# Altium PCB MCU.PcbDoc
Units mm, origin at the board's own origin, x right, y up, seen from the top; angles counter-clockwise.
Board outline 47.6 x 56 mm, 2 copper layers (Top Layer, Bottom Layer); 51 components, 75 nets, 191 pads, 174 vias.
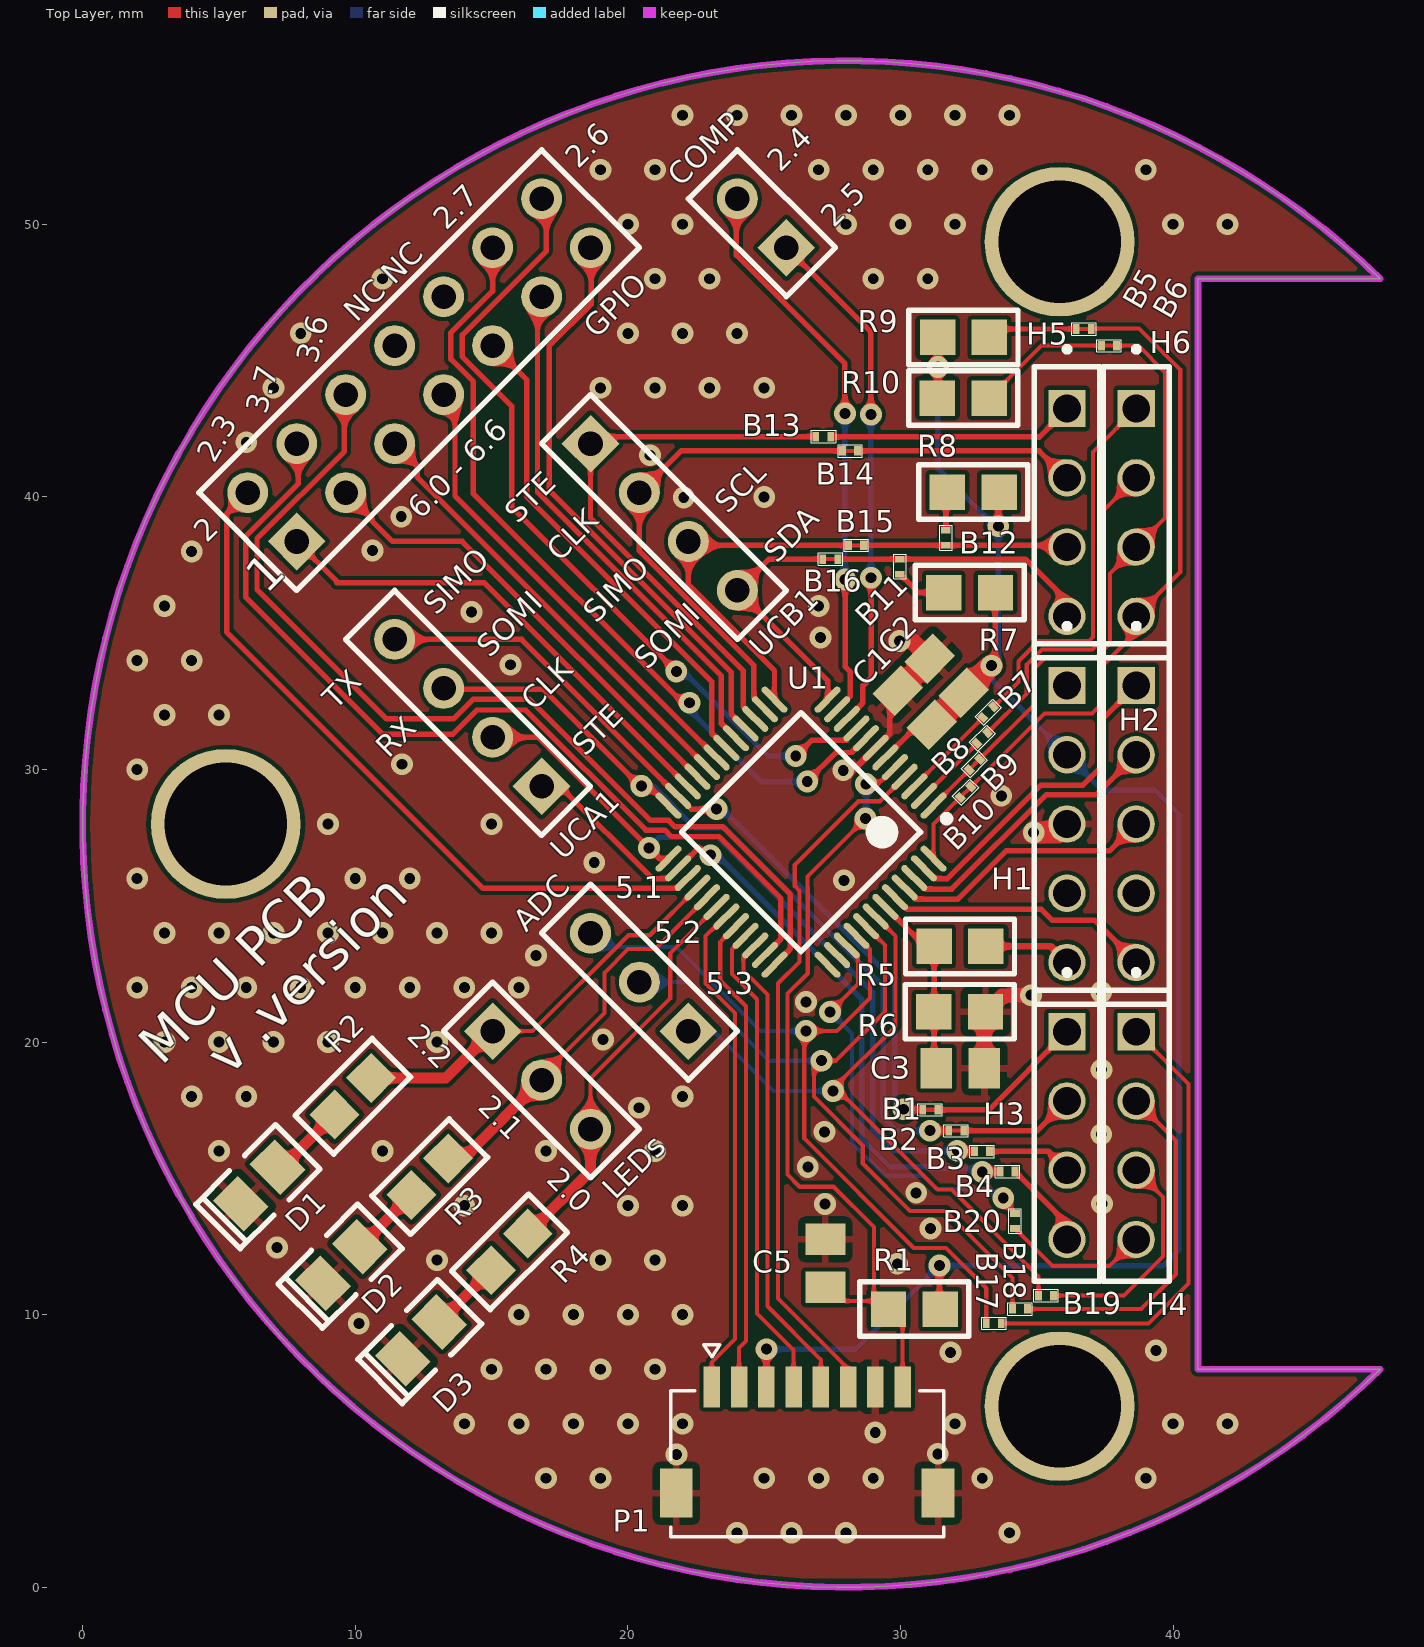
[diagram p0: Top Layer view]
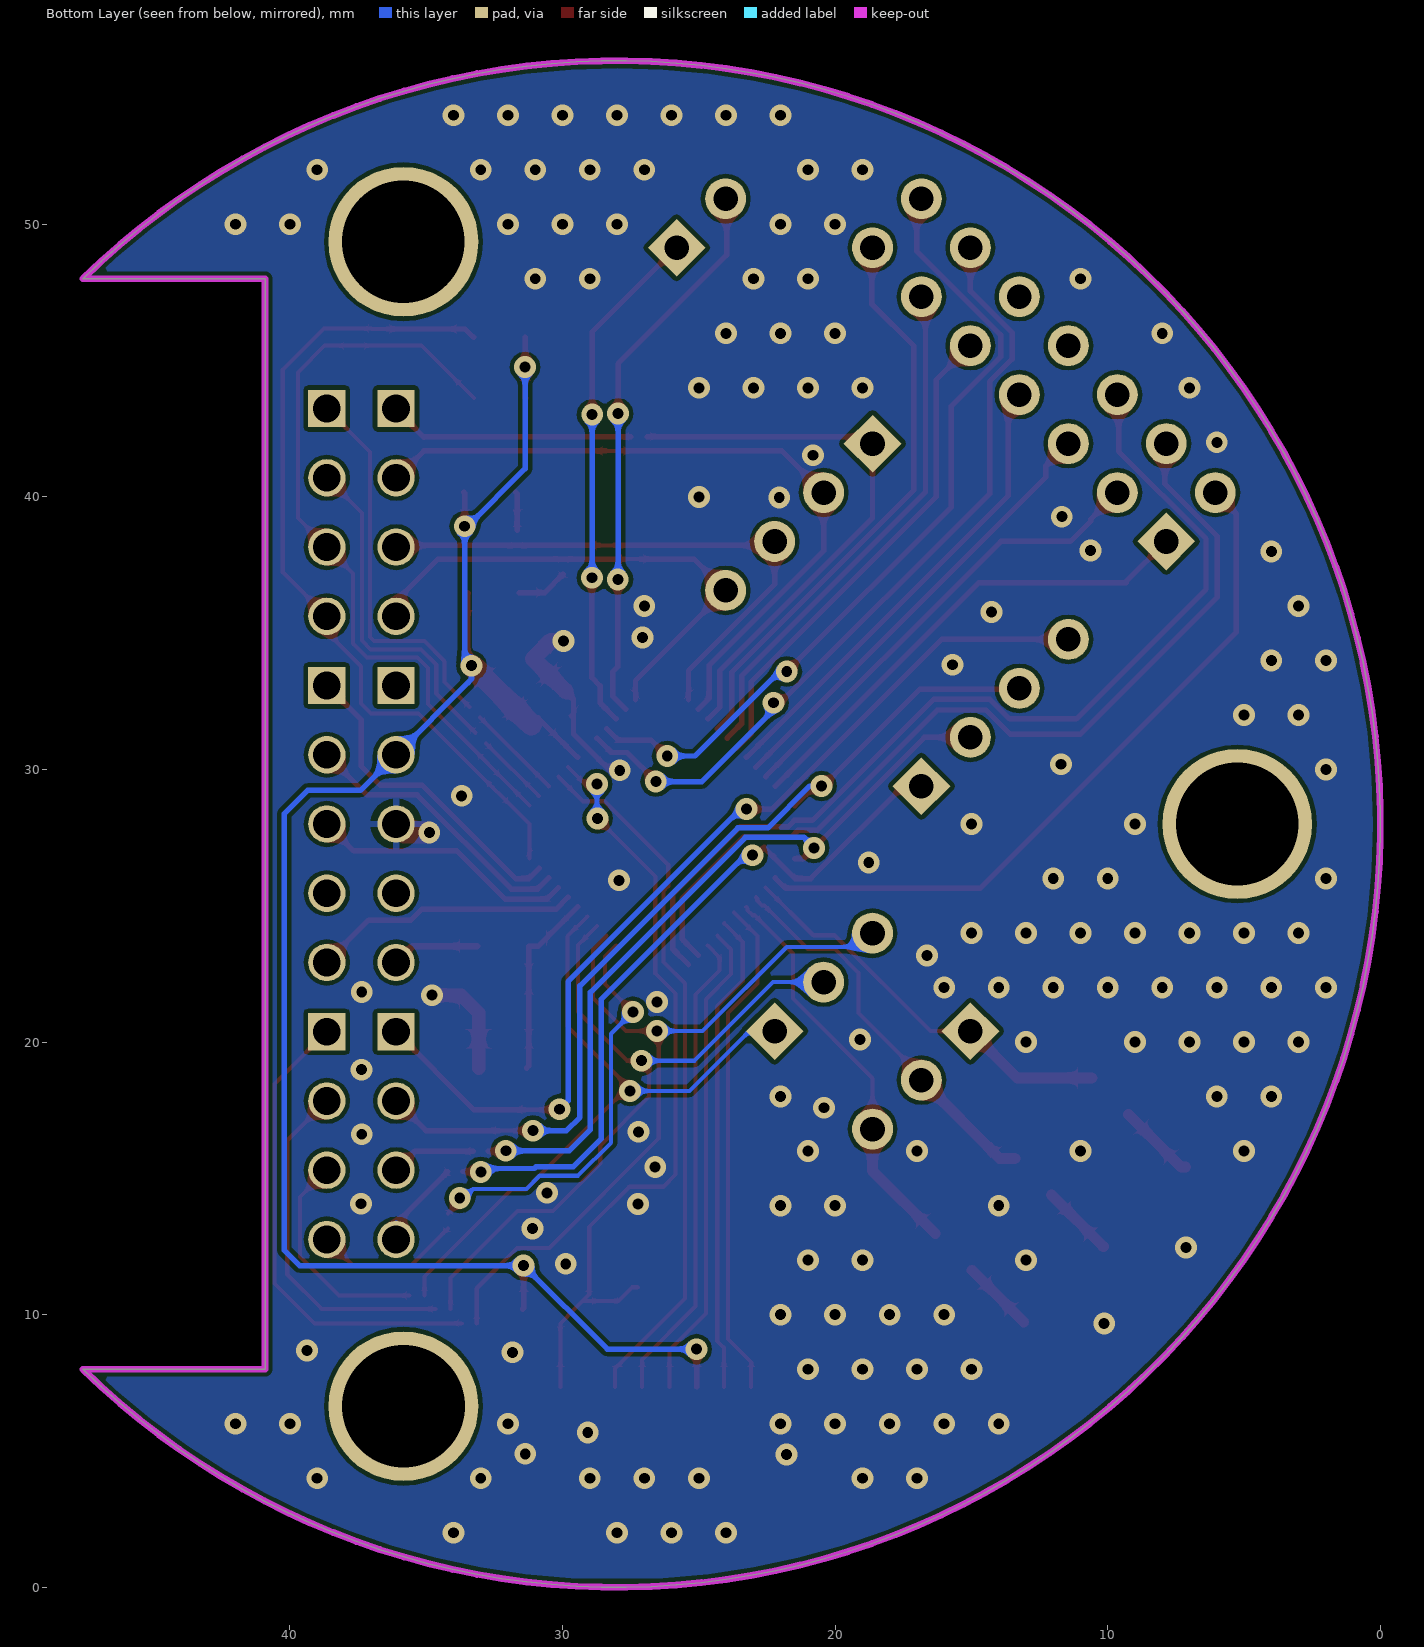
[diagram p1: Bottom Layer view, seen from below]

## Layer stack, top to bottom
Top Solder: solder mask 0.0102, Solder Resist, Dk 3.5
Top Layer: signal copper 0.0356
Dielectric 1: dielectric 0.32, FR-4, Dk 4.8
Bottom Layer: signal copper 0.0356
Bottom Solder: solder mask 0.0102, Solder Resist, Dk 3.5

## Board outline
47.596,8 cw(c28,28) 47.596,48 47.6,48 40.913,48 40.913,8

## Design rules (kind name [scope] priority, off if disabled: settings)
Clearance [All] p1: gap=0.152 ignorepadtopadclearanceinfootprint=FALSE except(0: Arc-Hole Track-Hole SMDPad-Hole THPad-Hole Via-Hole Fill-Hole Poly-Hole Region-Hole Text-Hole)
ComponentClearance [All] p1: gap=0.126 collisioncheckmode=3 verticalgap=0.254 showdistances=FALSE
HoleSize [All] p1: absolutevalues=TRUE maxlimit=6.3 minlimit=0.3 maxpercent=80.000 minpercent=20.000
PolygonConnect ViaConnect [All vs IsVia] p1: connectstyle=Direct reliefconductorwidth=0.254 reliefentries=4 polygonreliefangle="90 Angle" airgapwidth=0.254
PolygonConnect [All] p2: connectstyle=Relief reliefconductorwidth=0.254 reliefentries=4 polygonreliefangle="90 Angle" airgapwidth=0.254
RoutingVias [All] p1: holewidth=0.3 width=0.6 viastyle="Through Hole" minholewidth=0.3 minwidth=0.5 maxholewidth=1 maxwidth=5
SolderMaskExpansion [All] p1: expansion=0.102
Width [All] p1: maxlimit=25.4 minlimit=0.15 preferedwidth=0.152
28 further rules are at their usual default settings.

## Components (designator, comment, footprint, x,y, rotation, side; value= is the part's Value field where it differs from the comment)
ADC "Header 3" HDR1X3 22.222,20.403 r135 top
B1 "Solder Jumper Normally Closed 0201" "Solder Bridge Closed 0201" 31.089,17.517 r0 top net-tie
B2 "Solder Jumper Normally Closed 0201" "Solder Bridge Closed 0201" 32.044,16.75 r0 top net-tie
B3 "Solder Jumper Normally Open 0201" "Solder Bridge Open 0201" 32.995,15.99 r0 top
B4 "Solder Jumper Normally Open 0201" "Solder Bridge Open 0201" 33.929,15.253 r0 top
B5 "Solder Jumper Normally Closed 0201" "Solder Bridge Closed 0201" 36.726,46.158 r180 top net-tie
B6 "Solder Jumper Normally Closed 0201" "Solder Bridge Closed 0201" 37.652,45.547 r0 top net-tie
B7 "" "Solder Bridge Open 0201" 33.217,32.101 r225 top
B8 "" "Solder Bridge Open 0201" 32.998,31.153 r225 top
B9 "Solder Jumper Normally Closed 0201" "Solder Bridge Closed 0201" 32.714,30.183 r225 top net-tie
B10 "Solder Jumper Normally Closed 0201" "Solder Bridge Closed 0201" 32.385,29.169 r45 top net-tie
B11 "Solder Jumper Normally Open 0201" "Solder Bridge Open 0201" 29.979,37.438 r270 top
B12 "Solder Jumper Normally Open 0201" "Solder Bridge Open 0201" 31.668,38.5 r270 top
B13 "Solder Jumper Normally Open 0201" "Solder Bridge Open 0201" 27.168,42.21 r0 top
B14 "Solder Jumper Normally Closed 0201" "Solder Bridge Closed 0201" 28.147,41.684 r0 top net-tie
B15 "Solder Jumper Normally Closed 0201" "Solder Bridge Closed 0201" 28.372,38.222 r0 top net-tie
B16 "Solder Jumper Normally Closed 0201" "Solder Bridge Closed 0201" 27.425,37.72 r0 top net-tie
B17 "Solder Jumper Normally Open 0201" "Solder Bridge Open 0201" 33.423,9.683 r0 top
B18 "Solder Jumper Normally Open 0201" "Solder Bridge Open 0201" 34.388,10.212 r0 top
B19 "Solder Jumper Normally Open 0201" "Solder Bridge Open 0201" 35.341,10.703 r0 top
B20 "Solder Jumper Normally Open 0201" "Solder Bridge Open 0201" 34.202,13.437 r270 top
C1 "100nF" CAPC2012X94N 30.527,32.265 r315 top
C2 "10uF" CAPC2012X94N 31.705,33.443 r315 top
C3 "100nF" CAPC2012X94N 32.198,19.041 r0 top
C5 "1nF" CAPC2012X94N 27.242,11.884 r270 top
COMP "Header 2" HDR1X2 25.814,49.139 r135 top
D1 "LTST-C170KGKT" ECE-LED2012-0805SM 6.473,14.742 r225 top value=LED
D2 "LTST-C170KSKT" ECE-LED2012-0805SM 9.488,11.826 r225 top value=LED
D3 "LTST-C170KAKT" ECE-LED2012-0805SM 12.412,9.059 r225 top value=LED
GPIO "Header 7X2" HDR2X7 7.853,38.363 r45 top locked
H1 "SSQ-105-03-S-S" SAMTEC_SSQ-105-03-S-S 36.107,28 r270 top locked
H2 "SSQ-105-03-S-S" SAMTEC_SSQ-105-03-S-S 38.647,28 r270 top locked
H3 "SSQ-104-02-S-S" *SAMTEC_SSQ-104-02-S-S_SSQ-104-02-S-S(Primary) 36.107,16.57 r270 top locked
H4 "SSQ-104-02-S-S" *SAMTEC_SSQ-104-02-S-S_SSQ-104-02-S-S(Primary) 38.647,16.57 r270 top locked
H5 "SSQ-104-02-S-S" *SAMTEC_SSQ-104-02-S-S_SSQ-104-02-S-S(Primary) 36.107,39.43 r270 top locked
H6 "SSQ-104-02-S-S" *SAMTEC_SSQ-104-02-S-S_SSQ-104-02-S-S(Primary) 38.647,39.43 r270 top locked
LEDs "Header 3" HDR1X3 15.037,20.403 r315 top
P1 "5015680807" MOLEX_5015680807 26.58,4.804 r0 top
R1 "4.7K" 0805 30.51,10.203 r0 top value=4.7k
R2 "1K" 0805 9.912,18.012 r45 top value=1k
R3 "1K" 0805 12.733,15.063 r45 top value=1k
R4 "1K" 0805 15.656,12.304 r45 top value=1k
R5 "100k" 0805 32.183,23.513 r0 top
R6 "100k" 0805 32.169,21.113 r180 top
R7 "4.7k" 0805 32.536,36.49 r0 top
R8 "4.7k" 0805 32.672,40.174 r0 top
R9 "4.7k" 0805 32.312,45.849 r180 top
R10 "4.7k" 0805 32.304,43.624 r0 top
U1 "MSP430FR2355IPT" PT0048A_L 26.352,27.7 r225 top
UCA1 "Header 4" HDR1X4 16.833,29.383 r135 top locked
UCB1 "Header 4" HDR1X4 18.63,41.955 r315 top

## Footprints (in the part's own frame and the unit in brackets; to place one, negate y for a bottom-side part, rotate by r counter-clockwise, add the part's x,y. Pads: shape width x height; smd on the part's side, far side on the other; paste and mask are expansions set on the pad)
0805 [mm]
  rect 1.3x1.3 smd: 1(-0.95,0) 2(0.95,0)
  silkscreen extent -2,-1 2,1, body extent -1.1,-0.72 1.1,0.73, height 1.1
*SAMTEC_SSQ-104-02-S-S_SSQ-104-02-S-S(Primary) [mm]
  rect 1.37x1.37 hole 1.02: 01(-3.81,0)
  round 1.37 hole 1.02: 02(-1.27,0) 03(1.27,0) 04(3.81,0)
  silkscreen extent -6.08,-1.2 5.34,1.2
CAPC2012X94N [mm]
  rect 1.16x1.47 smd: 1(-0.88,0) 2(0.88,0)
  body extent -1.02,-0.7 1.02,0.7, height 1.23
ECE-LED2012-0805SM [mm] "RED AS AlGaAs SMD LED, Body; 2mm x 1.25 mm (LxW)"
  rect 1.3x1.6 smd: 1(-0.95,0) 2(0.95,0)
  silkscreen extent -2,-1.15 2.13,1.15
HDR1X2 [mm] "Connector; Header; 2 Position"
  rect 1.5x1.5 hole 0.9: 1(0,0)
  round 1.5 hole 0.9: 2(2.54,0)
  silkscreen extent -1.27,-1.27 3.81,1.27
HDR1X3 [mm] "Connector; Header; 3 Position"
  rect 1.5x1.5 hole 0.9: 1(0,0)
  round 1.5 hole 0.9: 2(2.54,0) 3(5.08,0)
  silkscreen extent -1.27,-1.27 6.35,1.27
HDR1X4 [mm] "Connector; Header; 4 Position"
  rect 1.5x1.5 hole 0.9: 1(0,0)
  round 1.5 hole 0.9: 2(2.54,0) 3(5.08,0) 4(7.62,0)
  silkscreen extent -1.27,-1.27 8.89,1.27
HDR2X7 [mm] "Connector; Header; 7x2 Position"
  rect 1.5x1.5 hole 0.9: 1(0,0)
  round 1.5 hole 0.9: 2(0,2.54) 3(2.54,0) 4(2.54,2.54) 5(5.08,0) 6(5.08,2.54) 7(7.62,0) 8(7.62,2.54) 9(10.16,0) 10(10.16,2.54) 11(12.7,0) 12(12.7,2.54) 13(15.24,0) 14(15.24,2.54)
  silkscreen extent -1.27,-1.27 16.51,3.81
MOLEX_5015680807 [mm]
  rect 0.6x1.5 smd mask+0: 1(-3.5,2.55) 2(-2.5,2.55) 3(-1.5,2.55) 4(-0.5,2.55) 5(0.5,2.55) 6(1.5,2.55) 7(2.5,2.55) 8(3.5,2.55)
  rect 1.2x1.8 smd mask+0: S1(4.8,-1.35) S2(-4.8,-1.35)
  silkscreen extent -5,-2.95 5,4.1, body extent -5,-2.93 5,2.97, height 4.65
PT0048A_L [mm]
  oval 1.25x0.25 smd paste+0 mask+0.051: 1(-4.125,2.75) 2(-4.125,2.25) 3(-4.125,1.75) 4(-4.125,1.25) 5(-4.125,0.75) 6(-4.125,0.25) 7(-4.125,-0.25) 8(-4.125,-0.75) 9(-4.125,-1.25) 10(-4.125,-1.75) 11(-4.125,-2.25) 12(-4.125,-2.75) 25(4.125,-2.75) 26(4.125,-2.25) 27(4.125,-1.75) 28(4.125,-1.25) 29(4.125,-0.75) 30(4.125,-0.25) 31(4.125,0.25) 32(4.125,0.75) 33(4.125,1.25) 34(4.125,1.75) 35(4.125,2.25) 36(4.125,2.75)
  oval 0.25x1.25 smd paste+0 mask+0.051: 13(-2.75,-4.125) 14(-2.25,-4.125) 15(-1.75,-4.125) 16(-1.25,-4.125) 17(-0.75,-4.125) 18(-0.25,-4.125) 19(0.25,-4.125) 20(0.75,-4.125) 21(1.25,-4.125) 22(1.75,-4.125) 23(2.25,-4.125) 24(2.75,-4.125) 37(2.75,4.125) 38(2.25,4.125) 39(1.75,4.125) 40(1.25,4.125) 41(0.75,4.125) 42(0.25,4.125) 43(-0.25,4.125) 44(-0.75,4.125) 45(-1.25,4.125) 46(-1.75,4.125) 47(-2.25,4.125) 48(-2.75,4.125)
  silkscreen extent -4.25,-3.1 3.1,3.55, body extent -4.5,-4.5 4.5,4.5, height 1.6
SAMTEC_SSQ-105-03-S-S [mm]
  rect 1.37x1.37 / inner round 1.37 / far side rect 1.37x1.37 hole 1.02: 1(-5.08,0)
  round 1.37 hole 1.02: 2(-2.54,0) 3(0,0) 4(2.54,0) 5(5.08,0)
  silkscreen extent -7.35,-1.2 6.61,1.2, body extent -6.6,-1.21 6.6,1.21, height 8.51
"Solder Bridge Closed 0201" [mm]
  rect 0.25x0.35 smd paste+0 mask+0: 1(-0.275,0) 2(0.275,0)
  Top Layer lines w0.15: -0.275,0 0.275,0
  silkscreen extent -0.45,-0.23 0.45,0.23
"Solder Bridge Open 0201" [mm]
  rect 0.25x0.35 smd paste+0 mask+0: 1(-0.275,0) 2(0.275,0)
  silkscreen extent -0.45,-0.23 0.45,0.23

## Part data
ADC LEDs: "Header, 3-Pin"
B7 B8: library part "Solder Jumper Normally Open 0201", DEBUG=DEBUG
C1 C2 C3 C5: library part "CAP 0805", "No Description Available", IsInLabBook=Yes
COMP: "Header, 2-Pin"
D1: library part DIO000105, "LED GREEN CLEAR 0805 SMD", TEMP="55 °C to + 85 °C", ALT PARTS=LTST-C190KGKT, MCR=20mA, MF="Lite-On Inc.", MFPN=LTST-C170KGKT, MVP=Y, MVR=2V, PKG=0805, S1L=https://www.digikey.co.nz/product-detail/en/lite-on-inc/LTST-C170KGKT/160-1414-1-ND/386776, S1PN=160-1414-1-ND
D2: library part DIO000104, "LED YELLOW CLEAR 0805 SM", TEMP="55 °C to + 85 °C", ALT PARTS=LTST-C190KSKT, MCR=20mA, MF="Lite-On Inc.", MFPN=LTST-C170KSKT, MVP=Y, MVR=2V, PKG=0805, S1L=https://www.digikey.co.nz/product-detail/en/lite-on-inc/LTST-C170KSKT/160-1416-1-ND/386780, S1PN=160-1416-1-ND, S2L=https://nz.mouser.com/ProductDetail/Lite-On/LTST-C170KSKT?qs=%2Fha2pyFaduiaE0aNI0zQNjcVUnE0q7HseH6H%252BEPh3n3lWm8h2QqBnQ%3D%3D, S2PN=859-LTST-C170KSKT
D3: library part DIO000104, "LED RED CLEAR 0805 SM", TEMP="55 °C to + 85 °C", ALT PARTS=LTST-C190KAKT, MCR=20mA, MF="Lite-On Inc.", MFPN=LTST-C190KAKT, MVP=Y, MVR=2V, PKG=0603, S1L=https://www.digikey.co.nz/en/products/detail/lite-on-inc/LTST-C190KAKT/386811, S1PN=160-1433-1-ND
GPIO: "Header, 7-Pin, Dual row"
H1 H2 P1: Package=None, Availability=Unavailable, Price=None
  H1 H2: MF="{'manufacturer': u'Samtec Inc.'}", MP=SSQ-105-03-S-S
  P1: MP=5015680807
R1 R2 R3 R4 R5 R6 R7 R8 R9 R10: library part Resistor, "Resistor"
  R1 R2 R3 R4 R5 R6 R7 R8: IsInLabBook=Yes
U1: "Imported", Manufacturer="Texas Instruments", PartNumber=MSP430FR2355IPT
UCA1 UCB1: "Header, 4-Pin"
B1 B2 B3 B4 B5 B6 B9 B10 B11 B12 B13 B14 B15 B16 B17 B18 B19 B20: DEBUG=DEBUG
H3 H4 H5 H6: Check_prices=https://www.snapeda.com/parts/SSQ-104-02-S-S/Samtec/view-part/?ref=eda, SnapEDA_Link=https://www.snapeda.com/parts/SSQ-104-02-S-S/Samtec/view-part/?ref=snap

## Free pads (board coordinates)
  round 5.5 hole 4.5: 1(5.25,28) 1(35.837,6.643) 1(35.837,49.357)

## Via types
v1: diameter 0.8, hole 0.4, Top Layer to Bottom Layer, tented both sides, 171 vias
v2: diameter 0.8, hole 0.4, Top Layer to Bottom Layer, tented bottom, 3 vias

## Nets (pads, with @x,y where several pads share a name; then routed paths per layer and width w, separated by ;. In a path a pad name is that pad's centre, name@x,y a point inside that pad or via, vN(x,y) a via of type N, cw(c..) or ccw(c..) an arc to the next point about the centre after c; other vN are vias at no path point)
1V8: H1.1
1V8_EN: H2.3 U1.45 | length 9.8
  Top Layer w0.2: U1.45 30.574,25.246 32.102,25.246 33.874,27.018 37.665,27.018 H2.3
1V8_PG: H2.1 U1.47 | length 11.9
  Top Layer w0.2: U1.47 31.237,25.997 31.723,25.997 35.15,29.424 36.689,29.424 37.382,30.118 37.382,31.815 H2.1
3V3: C1.2 C2.2 H1.2 P1.3 R1.2 R7.2 R8.2 R9.2 R10.1 U1.6 | length 69.6
  Top Layer w0.2: P1.3 25.082,7.356 v1(25.082,8.734) ; U1.6 C1.2@30.898,31.894 ; R10.1 R10.1@31.362,43.632 ; R9.2 R10.1@31.362,43.632 ; v1(31.373,44.764) 31.373,43.643 R10.1@31.362,43.632 ; v1(31.427,11.802) 31.427,10.236 R1.2 ; v1@33.314,33.807 33.47,33.963 33.47,36.465 33.466,36.469 R7.2 ; v1(33.589,38.921) 33.589,40.141 R8.2
  Top Layer w0.8: C1.2 33.314,33.807 v1(33.342,33.807)
  Bottom Layer w0.2: v1(25.082,8.734) 28.36,8.734 v1(31.427,11.802) 39.645,11.802 40.21,12.366 40.21,28.375 39.35,29.235 37.412,29.235 H1.2 33.466,33.181 33.47,33.186 33.342,33.314 v1(33.342,33.807) 33.591,34.057 33.589,34.058 v1(33.589,38.921) 33.487,38.921 31.373,41.034 v1(31.373,44.764)
3V3_EN: H2.4
3V3_PG: H2.2 U1.46 | length 10.4
  Top Layer w0.2: U1.46 30.917,25.61 31.875,25.61 35.338,29.072 37.179,29.072 H2.2
5V: H1.4
5V_EN: H2.5 U1.44 | length 9.8
  Top Layer w0.2: U1.44 30.247,24.866 35.168,24.866 35.56,24.474 37.116,24.474 H2.5@38.659,22.931
ADC9: ADC.1 B19.1 U1.42 | length 25
  Top Layer w0.153: U1.42 29.813,23.885 29.813,20.579 27.474,18.239 27.506,18.207 v2(27.529,18.207) 27.746,18.207 31.362,14.591 31.88,14.591 35.066,11.405 B19.1
  Bottom Layer w0.153: ADC.1 23.147,20.403 25.343,18.207 v2(27.529,18.207)
ADC10: ADC.2 B18.1 U1.41 | length 27.4
  Top Layer w0.153: U1.41 29.435,23.557 29.435,21.115 27.637,19.318 v2(27.102,19.318) 26.824,19.039 26.824,18.001 28.614,16.21 28.614,15.542 30.349,13.808 31.647,13.808 34.113,11.342 B18.1
  Bottom Layer w0.153: ADC.2 22.283,22.199 25.164,19.318 v2(27.102,19.318)
ADC11: ADC.3 B17.1 U1.40 | length 28.9
  Top Layer w0.153: U1.40 28.881,23.403 28.881,21.62 27.668,20.407 v2(26.537,20.407) 26.473,20.343 26.473,16.464 30.488,12.449 31.669,12.449 33.148,10.97 B17.1
  Bottom Layer w0.153: ADC.3 19.131,23.493 21.775,23.493 24.861,20.407 v2(26.537,20.407)
COMP1.0: COMP.1 U1.10 | length 19
  Top Layer w0.2: COMP.1 28.913,46.04 v1(28.913,43.02) ; U1.10 28.624,32.448 28.624,33.066 28.924,33.366 v1(28.924,37.034)
  Bottom Layer w0.2: v1@28.876,36.985 v1@28.913,37.023 ; v1(28.913,43.02) v1@28.913,37.023 ; v1(28.924,37.034) v1@28.913,37.023
COMP1.1: COMP.2 U1.11 | length 20.6
  Top Layer w0.2: COMP.2@23.978,50.898 23.978,48.869 27.961,44.886 v1(27.961,43.058) ; U1.11 28.155,32.686 28.155,33.592 27.972,33.776 v1(27.972,36.972)
  Bottom Layer w0.2: v1@27.961,36.972 v1(27.961,43.058)
GND: C1.1 C2.1 C3.2 C5.1 D1.2 D2.2 D3.2 H1.3 P1.7 P1.S1 P1.S2 R6.1 U1.7 | length 12.7
  Top Layer w0.2: v1(27.9,29.97) 27.9,29.836 28.017,29.719 U1.7 29.599,31.301 29.599,32.581 C1.1
  Top Layer w0.5: C3.2 33.078,21.073 R6.1 33.726,21.721 v1(34.792,21.721)
  Top Layer w0.6: C1.1 C2.1 30.436,34.712 v1(29.964,34.712)
  Top Layer w0.8: v1(34.887,27.685) 35.792,27.685 H1.3
  other v1: 24,2 26,2 28,2 34,2 17,4 19,4 25,4 27,4 29,4 33,4 39,4 21.787,4.868 31.366,4.896 29.075,5.677 14,6 16,6 18,6 20,6 22,6 32,6 40,6 42,6 15,8 17,8 19,8 21,8 31.837,8.619 39.373,8.687 10.131,9.677 16,10 18,10 20,10 22,10 29.884,11.866 13,12 19,12 21,12 7.126,12.463 31.099,13.157 14,14 20,14 22,14 27.235,14.059 37.388,14.068 30.575,14.471 26.602,15.418 5,16 11,16 17,16 21,16 37.365,16.618 27.21,16.708 20.406,17.591 4,18 6,18 22,18 37.376,18.987 3,20 5,20 7,20 9,20 13,20 19.088,20.096 26.535,21.468 37.365,21.841 2,22 4,22 6,22 8,22 10,22 12,22 14,22 16,22 16.634,23.175 3,24 5,24 7,24 9,24 11,24 13,24 15,24 27.932,25.934 2,26 10,26 12,26 18.767,26.591 9,28 15,28 33.7,29.034 2,30 11.711,30.19 3,32 5,32 15.697,33.841 2,34 4,34 27.067,34.843 14.269,35.775 3,36 27,36 4,38 10.628,38.033 11.685,39.274 22.051,39.981 25,40 20.811,41.528 6,42 7,44 19,44 21,44 23,44 25,44 8,46 20,46 22,46 24,46 11,48 21,48 23,48 29,48 31,48 20,50 22,50 28,50 30,50 32,50 40,50 42,50 19,52 21,52 27,52 29,52 31,52 33,52 39,52 22,54 24,54 26,54 28,54 30,54 32,54 34,54
GPIO2.3: GPIO.2 U1.27 | length 26.4
  Top Layer w0.2: GPIO.2@6.044,40.139 5.284,39.379 5.284,35.051 14.693,25.643 21.819,25.643 U1.27
GPIO2.6: GPIO.14 U1.9 | length 30.3
  Top Layer w0.2: GPIO.14 17.014,50.755 17.014,49.026 13.928,45.94 13.928,45.135 15.734,43.328 15.734,39.635 v1(21.777,33.593) ; v1(26.159,30.494) 26.737,31.072 27.955,31.072 U1.9
  Bottom Layer w0.2: v1(21.777,33.593) 22.042,33.593 25.141,30.494 v1(26.159,30.494)
GPIO2.7: GPIO.12 U1.8 | length 29.6
  Top Layer w0.2: GPIO.12 15.037,47.548 13.511,46.021 13.511,45.053 14.333,44.231 14.333,40.114 21.999,32.448 v1(22.264,32.448) ; v1(26.578,29.555) 26.578,29.571 27.63,30.622 28.213,30.622 U1.8
  Bottom Layer w0.2: v1(22.264,32.448) 22.264,32.175 24.884,29.555 v1(26.578,29.555)
GPIO3.4: U1.38
GPIO3.5: U1.37
GPIO3.6: GPIO.6 U1.36 | length 36.1
  Top Layer w0.2: GPIO.6@9.6,43.716 9.6,41.668 6.396,38.464 6.396,36.607 11.149,31.853 13.603,31.853 14.333,32.584 16.38,32.584 20.834,28.13 21.5,28.13 21.735,27.895 23.483,27.895 25.964,25.414 25.964,23.423 U1.36
GPIO3.7: GPIO.4 U1.35 | length 33.6
  Top Layer w0.2: GPIO.4@7.907,41.911 7.907,40.477 5.982,38.552 5.982,36.324 11.015,31.292 13.572,31.292 14.461,32.181 16.252,32.181 20.656,27.777 21.354,27.777 21.589,27.542 23.337,27.542 25.611,25.268 25.611,23.778 U1.35
GPIO5.4: B20.1 U1.39 | length 15.3
  Top Layer w0.153: v1(27.42,21.109) 28.439,22.128 28.439,23.138 U1.39 ; v1(33.77,14.277) 33.77,14.144 B20.1
  Bottom Layer w0.153: v1(27.42,21.109) 28.225,20.305 28.225,16.305 29.43,15.1 30.836,15.1 31.326,14.61 33.28,14.61 33.601,14.289 v1@33.76,14.289
GPIO6.0: GPIO.1 U1.22 | length 18.1
  Top Layer w0.2: GPIO.1 9.326,36.89 9.326,36.851 14.727,36.851 U1.22
GPIO6.1: GPIO.3 U1.21 | length 17.3
  Top Layer w0.2: GPIO.3 10.631,39.177 10.631,39.102 11.369,38.364 13.92,38.364 U1.21
GPIO6.2: GPIO.5 U1.20 | length 16.6
  Top Layer w0.2: GPIO.5 12.277,41.123 12.277,40.714 U1.20
GPIO6.3: GPIO.7 U1.19 | length 17.5
  Top Layer w0.2: GPIO.7 13.658,43.334 13.658,40.04 U1.19
GPIO6.4: GPIO.9 U1.18 | length 18.3
  Top Layer w0.2: GPIO.9 16.287,44.297 16.287,40.008 23.08,33.214 23.08,31.325 U1.18
GPIO6.5: GPIO.11 U1.17 | length 19.3
  Top Layer w0.2: GPIO.11 16.685,47.195 16.685,40.175 23.433,33.427 23.433,31.68 U1.17
GPIO6.6: GPIO.13 U1.16 | length 21.3
  Top Layer w0.2: GPIO.13 18.652,49.117 18.652,47.066 17.114,45.527 17.114,40.245 23.785,33.573 23.785,32.035 U1.16
LED1: LEDs.1 R2.2 U1.28 | length 14.9
  Top Layer w0.153: LEDs.1 16.508,20.403 20.026,23.92 20.804,23.92 U1.28
  Top Layer w0.4: R2.2 13.319,18.684 LEDs.1
LED2: LEDs.2 R3.2 U1.29 | length 14.4
  Top Layer w0.153: LEDs.2@16.758,18.682 19.138,21.062 19.138,22.541 20.01,23.413 21.003,23.413 22.599,25.008 22.678,25.008 22.856,25.187 22.856,25.266 U1.29
  Top Layer w0.4: R3.2 13.962,15.735 LEDs.2
LED3: LEDs.3 R4.2 U1.30 | length 14.8
  Top Layer w0.153: LEDs.3@18.63,16.905 18.63,18.674 21.552,21.596 21.552,23.254 22.952,24.655 23.031,24.655 23.21,24.834 23.21,24.912 U1.30
  Top Layer w0.4: R4.2 18.63,15.277 LEDs.3
NetB1_2: B1.2 H3.01 | length 5.9
  Top Layer w0.2: B1.2 33.244,17.517 H3.01
NetB2_2: B2.2 H3.02 | length 4.2
  Top Layer w0.2: B2.2 35.017,16.75 H3.02
NetB3_2: B3.2 H3.03 | length 3.1
  Top Layer w0.2: B3.2 35.417,15.99 H3.03
NetB4_2: B4.2 H3.04 | length 3.3
  Top Layer w0.2: B4.2 H3.04@36.107,13.349
  Bottom Layer w0.2: H3.04 H3.04@36.107,13.349
NetB5_1: B5.1 B10.2 H6.04 | length 23.4
  Top Layer w0.15: B10.2 35.277,32.06 37.034,32.06 37.4,32.427 37.4,33.786 38.647,35.033 H6.04 40.262,37.235 40.262,44.667 38.756,46.173 B5.1@37.005,46.173
NetB5_2: B5.2 R9.1 | length 3.3
  Top Layer w0.2: R9.1 33.57,46.158 B5.2
NetB6_1: B6.1 R10.2 | length 4.9
  Top Layer w0.15: R10.2 35.177,45.547 B6.1
NetB6_2: B6.2 B9.1 H6.03 | length 20.3
  Top Layer w0.15: B9.1 34.938,32.407 34.938,33.718 35.323,34.103 37.173,34.103 37.683,34.613 37.683,37.196 H6.03 39.708,39.221 39.708,44.565 38.726,45.547 B6.2
NetB7_1: B7.1 H6.01 | length 14.2
  Top Layer w0.15: B7.1 34.331,33.215 34.331,33.969 35.069,34.708 36.912,34.708 37.058,34.853 37.058,41.651 H6.01
NetB8_1: B8.1 H6.02 | length 12.7
  Top Layer w0.15: B8.1 34.633,32.788 34.633,33.844 35.194,34.405 37.038,34.405 37.36,34.728 37.36,39.413 H6.02
NetB11_1: B11.1 B16.2 H5.04 | length 9.6
  Top Layer w0.2: B16.2 34.577,37.72 36.063,36.234 H5.04@36.063,35.636
NetB11_2: B11.2 R7.1 | length 1.9
  Top Layer w0.2: B11.2 30.652,36.49 R7.1
NetB12_1: B12.1 R8.1 | length 1.4
  Top Layer w0.2: B12.1 31.669,40.121 R8.1
NetB12_2: B12.2 B15.2 H5.03 | length 7.5
  Top Layer w0.2: B15.2 36.045,38.222 H5.03 H5.03@36.103,38.156
NetB13_2: B13.2 H5.01 | length 9
  Top Layer w0.2: B13.2@27.502,42.202 35.07,42.202 35.085,42.187 H5.01@36.116,43.218
NetB14_2: B14.2 H5.02 | length 8.1
  Top Layer w0.2: B14.2 35.09,41.684 H5.02@36.088,40.686
NetB17_2: B17.2 H4.01 | length 17.5
  Top Layer w0.15: B17.2 39.1,9.683 40.561,11.144 40.561,18.466 H4.01
NetB18_2: B18.2 H4.02 | length 12.9
  Top Layer w0.153: B18.2 38.83,10.212 40.098,11.481 40.098,16.389 H4.02
NetB19_2: B19.2 H4.03 | length 8.2
  Top Layer w0.15: B19.2 38.197,10.703 39.625,12.131 39.625,14.322 H4.03
NetB20_2: B20.2 H4.04 | length 5.4
  Top Layer w0.153: B20.2 35.58,11.784 37.671,11.784 H4.04
NetD1_1: D1.1 R2.1 | length 2.9
  Top Layer w0.4: D1.1 7.314,15.414 R2.1
NetD2_1: D2.1 R3.1 | length 2.7
  Top Layer w0.4: D2.1 10.168,12.498 R3.1
NetD3_1: D3.1 R4.1 | length 2.7
  Top Layer w0.4: D3.1 R4.1
NetP1_1: P1.1 U1.31 | length 18.6
  Top Layer w0.15: P1.1 23.08,8.259 23.931,9.11 23.931,21.069 22.85,22.15 22.85,23.888 U1.31@23.716,24.753
NetP1_2: P1.2 U1.32 | length 17.8
  Top Layer w0.15: U1.32@24.07,24.358 U1.32 23.39,23.678 23.39,22.251 24.326,21.315 24.326,9.033 24.08,8.787 P1.2
NetP1_4: P1.4 U1.33 | length 17.7
  Top Layer w0.15: U1.33 23.82,23.401 23.82,22.493 24.743,21.571 24.743,10.05 26.08,8.713 P1.4
NetP1_5: P1.5 U1.34 | length 17.6
  Top Layer w0.15: U1.34 24.236,23.11 24.236,22.622 25.116,21.742 25.116,10.31 27.08,8.346 P1.5
Reset: C5.2 P1.8 R1.1 U1.5 | length 29.9
  Top Layer w0.152: C5.2 27.447,11.004 27.949,10.502 R1.1@29.261,10.502 ; v1(28.714,28.206) 26.586,26.078 26.586,25.687 26.597,25.676 26.597,22.523 25.853,21.779 25.853,15.138 26.297,14.694 27.55,14.694 29.023,13.222 29.023,10.74 R1.1@29.261,10.502 ; v1(28.74,29.463) 28.787,29.463 28.981,29.269 U1.5 ; P1.8 30.08,9.683 R1.1 R1.1@29.261,10.502
  Bottom Layer w0.152: v1(28.714,28.206) 28.458,28.206 28.438,28.226 28.74,28.527 v1(28.74,29.463)
TEST: P1.6 U1.4 | length 26
  Top Layer w0.152: P1.6 28.08,8.025 25.512,10.593 25.512,22.158 26.292,22.939 26.292,25.55 26.124,25.718 26.124,26.505 28.453,28.834 29.253,28.834 U1.4
UCA1_CLK: B3.1 U1.25 UCA1.2 | length 28.1
  Top Layer w0.2: UCA1.2 16.725,31.179 v1(20.779,27.125) 21.176,26.728 U1.25 ; v1@32.107,15.99 B3.1
  Bottom Layer w0.2: v1(20.779,27.125) 20.779,27.145 21.143,27.509 23.297,27.509 28.983,21.823 28.983,16.787 29.76,16.01 32.076,16.01 v1(32.081,16.016) v1@32.107,15.99
UCA1_RX/MISO: B2.1 U1.24 UCA1.3 | length 29.4
  Top Layer w0.2: UCA1.3 13.278,32.938 16.897,32.938 20.445,29.39 v1(20.499,29.39) 20.773,29.39 U1.24 ; v1(31.084,16.75) B2.1
  Bottom Layer w0.2: v1(20.499,29.39) 20.938,29.39 22.466,27.861 23.566,27.861 29.363,22.065 29.363,17.242 29.854,16.75 v1(31.084,16.75)
UCA1_STE: B4.1 U1.26 UCA1.1 | length 26.8
  Top Layer w0.2: UCA1.1 17.514,29.383 20.9,25.997 21.466,25.997 U1.26 22.609,27.14 23.027,26.722 v1(23.027,26.857) ; v1@33.012,15.253 B4.1
  Bottom Layer w0.2: v1(23.027,26.857) 23.292,26.857 28.583,21.565 28.583,16.448 29.603,15.429 30.972,15.429 31.037,15.363 32.873,15.363 v1(32.998,15.239) v1@33.012,15.253
UCA1_TX/MOSI: B1.1 U1.23 UCA1.4 | length 29.1
  Top Layer w0.2: UCA1.4 16.099,34.771 U1.23 22.323,28.547 v1(23.249,28.547) ; v1@30.132,17.517 B1.1
  Bottom Layer w0.2: v1(23.249,28.547) 23.466,28.547 29.794,22.22 29.794,17.855 v1(30.114,17.535) v1@30.132,17.517
UCB0_CLK: B8.2 U1.2 | length 2.7
  Top Layer w0.15: U1.2 30.872,29.026 B8.2
UCB0_SCL/MISO: B10.1 U1.48 | length 2.7
  Top Layer w0.15: U1.48 31.213,28.002 31.218,28.002 B10.1
UCB0_SDA/MOSI: B9.2 U1.1 | length 1.9
  Top Layer w0.15: U1.1 32.519,29.979 B9.2
UCB0_STE: B7.2 U1.3 | length 3.6
  Top Layer w0.15: U1.3 30.506,29.39 B7.2
UCB1_CLK: B14.1 U1.14 UCB1.2 | length 17.9
  Top Layer w0.2: U1.14 24.625,32.61 24.625,33.816 20.426,38.015 UCB1.2 21.95,41.684 B14.1
UCB1_MISO/SCL: B16.1 U1.12 UCB1.4 | length 9
  Top Layer w0.2: B16.1 25.17,37.72 UCB1.4 27.324,33.261 U1.12
UCB1_MOSI/SDA: B15.1 U1.13 UCB1.3 | length 13
  Top Layer w0.2: U1.13 25.379,33.627 22.222,36.785 UCB1.3 22.363,38.221 B15.1@28.102,38.221
UCB1_STE: B13.1 U1.15 UCB1.1 | length 21
  Top Layer w0.2: U1.15 24.227,32.3 24.227,33.63 18.63,39.227 UCB1.1 18.884,42.21 B13.1
Vbat: H1.5 R5.2 | length 3.2
  Top Layer w0.25: R5.2 35.514,23.513 H1.5
Vbat/2: C3.1 R5.1 R6.2 U1.43 | length 6.9
  Top Layer w0.2: U1.43 30.893,23.513 R5.1 31.233,19.126 C3.1
pads on no net: GPIO.8 GPIO.10

## Polygon pours and split planes (outlines as drawn)
GND on Bottom Layer "Bottom GND" (solid, remove dead copper, pour order 4): 2.24,57.31 48.405,57.31 48.405,7.322 41.411,0.329 4.425,0.329 0.154,4.6 0.154,50.269
GND on Top Layer "Top GND" (solid, remove dead copper, pour order 0): 10.509,54.221 36.122,57.31 49.46,46.95 41.351,46.95 41.467,8.897 49.46,8.897 37.623,0.329 15.622,0.329 0.094,15.856 0.094,35.024

## Keep-outs
Keep-Out Layer:
  the board outline again, w0.25

## Silkscreen, mask and mechanical layers (free items; w line width, h text height)
Top Overlay:
  text "2.6" at 18.182,51.998 h0.8 r45
  text "2.4" at 25.596,51.879 h0.8 r45
  text "2.5" at 27.55,49.831 h0.8 r45
  text "2.7" at 13.341,49.739 h0.8 r45
  text "NC NC" at 10.052,46.364 h0.8 r45
  text "3.6" at 8.594,44.85 h0.8 r75
  text "3.7" at 6.735,42.991 h0.8 r75
  text "2.3" at 4.824,41.201 h0.8 r60
  text "SCL" at 23.664,39.352 h0.8 r45
  text "6.0 - 6.6" at 12.399,39.141 h0.8 r45
  text "STE" at 15.958,38.983 h0.8 r45
  text "2" at 4.547,38.28 h0.8 r45
  text "CLK" at 17.499,37.581 h0.8 r45
  text "SDA" at 25.464,37.522 h0.8 r45
  text "SIMO" at 12.969,35.627 h0.8 r45
  text "SIMO" at 18.833,35.328 h0.8 r45
  text "SOMI" at 14.938,34.065 h0.8 r45
  text "SOMI" at 20.707,33.614 h0.8 r45
  text "TX" at 9.284,32.156 h0.8 r45
  text "CLK" at 16.57,32.113 h0.8 r45
  text "STE" at 18.437,30.442 h0.8 r45
  text "RX" at 11.23,30.381 h0.8 r45
  text "5.1" at 19.541,25.285 h0.8
  text "5.2" at 20.964,23.621 h0.8
  text "5.3" at 22.849,21.749 h0.8
  text "2.2" at 11.847,20.168 h0.8 r315
  text ".version" at 6.615,19.865 h1.4 r45
  text "MCU PCB" at 2.901,19.099 h1.4 r45
  text "v" at 5.386,18.713 h1.4 r45
  text "2.1" at 14.463,17.57 h0.8 r315
  text "2.0" at 16.97,14.917 h0.8 r315
Mechanical 1:
  text "Battery cutout" at 46.172,24.284 h1.52 r90
Mechanical 15:
  lines w0.254: 41.46,9.025 49.46,9.025 49.46,47.025 41.46,47.025 41.46,9.025

## Text inside footprints (layer, text, board x,y; h text height)
GPIO: Top Overlay "1" at 6.727,36.399 h1.27 r45